# Altium PCB DDR4-UDIMM — 16 GB DDR4.PcbDoc (part 1 of 2)
Units mm, origin at the board's own origin, x right, y up, seen from the top; angles counter-clockwise.
Board outline 133.35 x 31.25 mm, 8 copper layers (Top Layer 1, L2_PWR_GND, L3_DQ_ADDR, L4_VDD, L5_ADDR, L6_ADDR_CK, L7_PWR_GND, Bottom Layer 1), stack 1.398 mm thick; 206 components, 228 nets, 1312 pads, 481 vias.
Unrouted connection lines stored in the file: 1002.
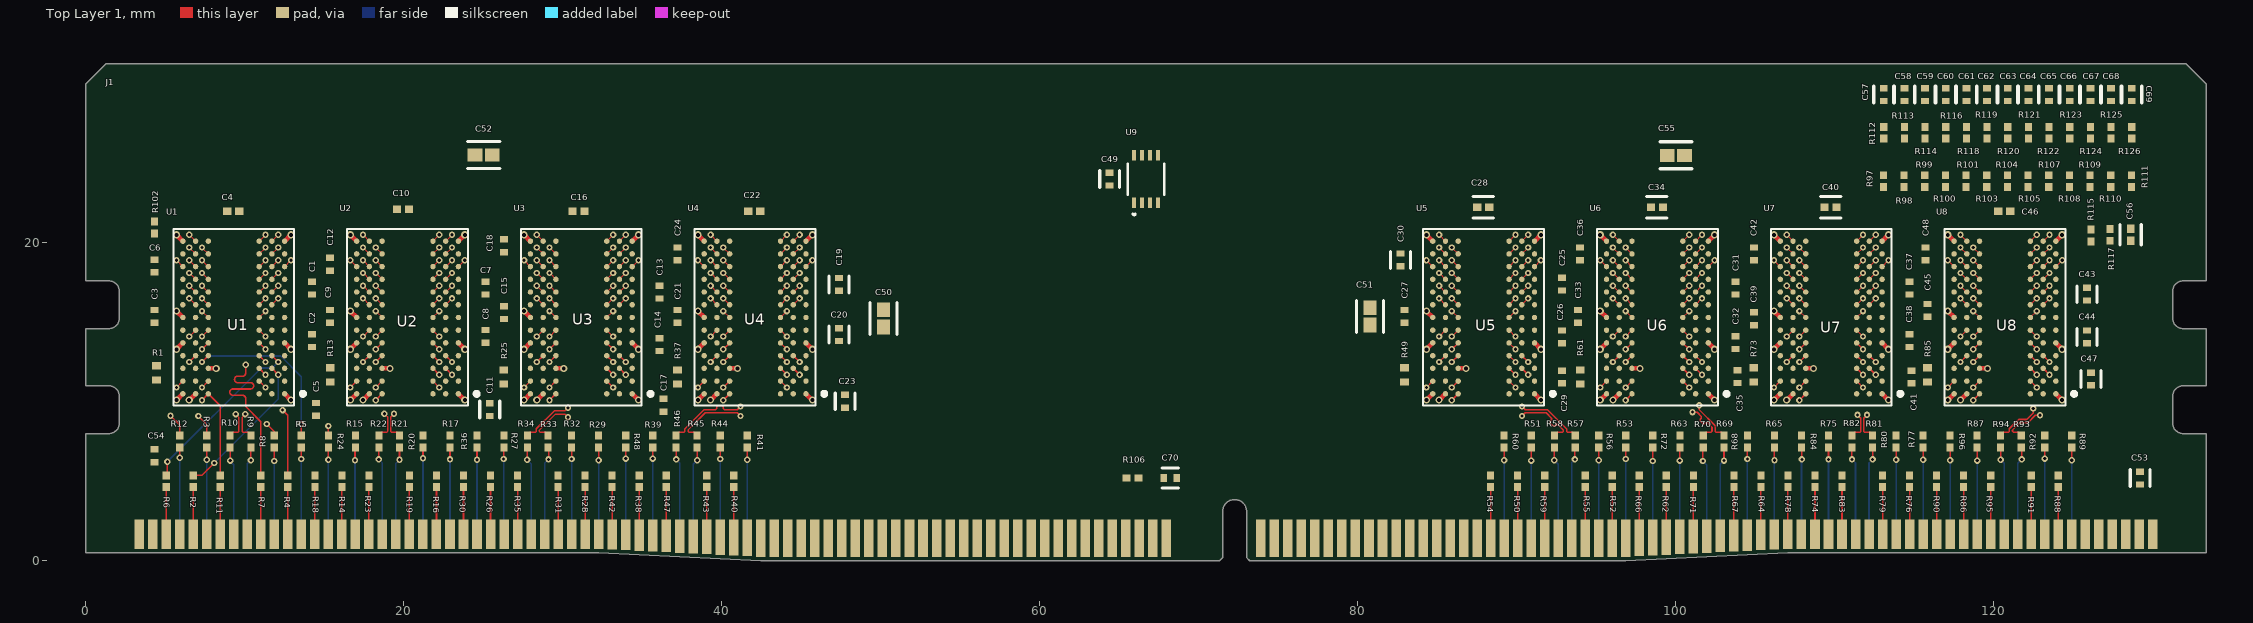
[diagram p0: Top Layer 1 view]
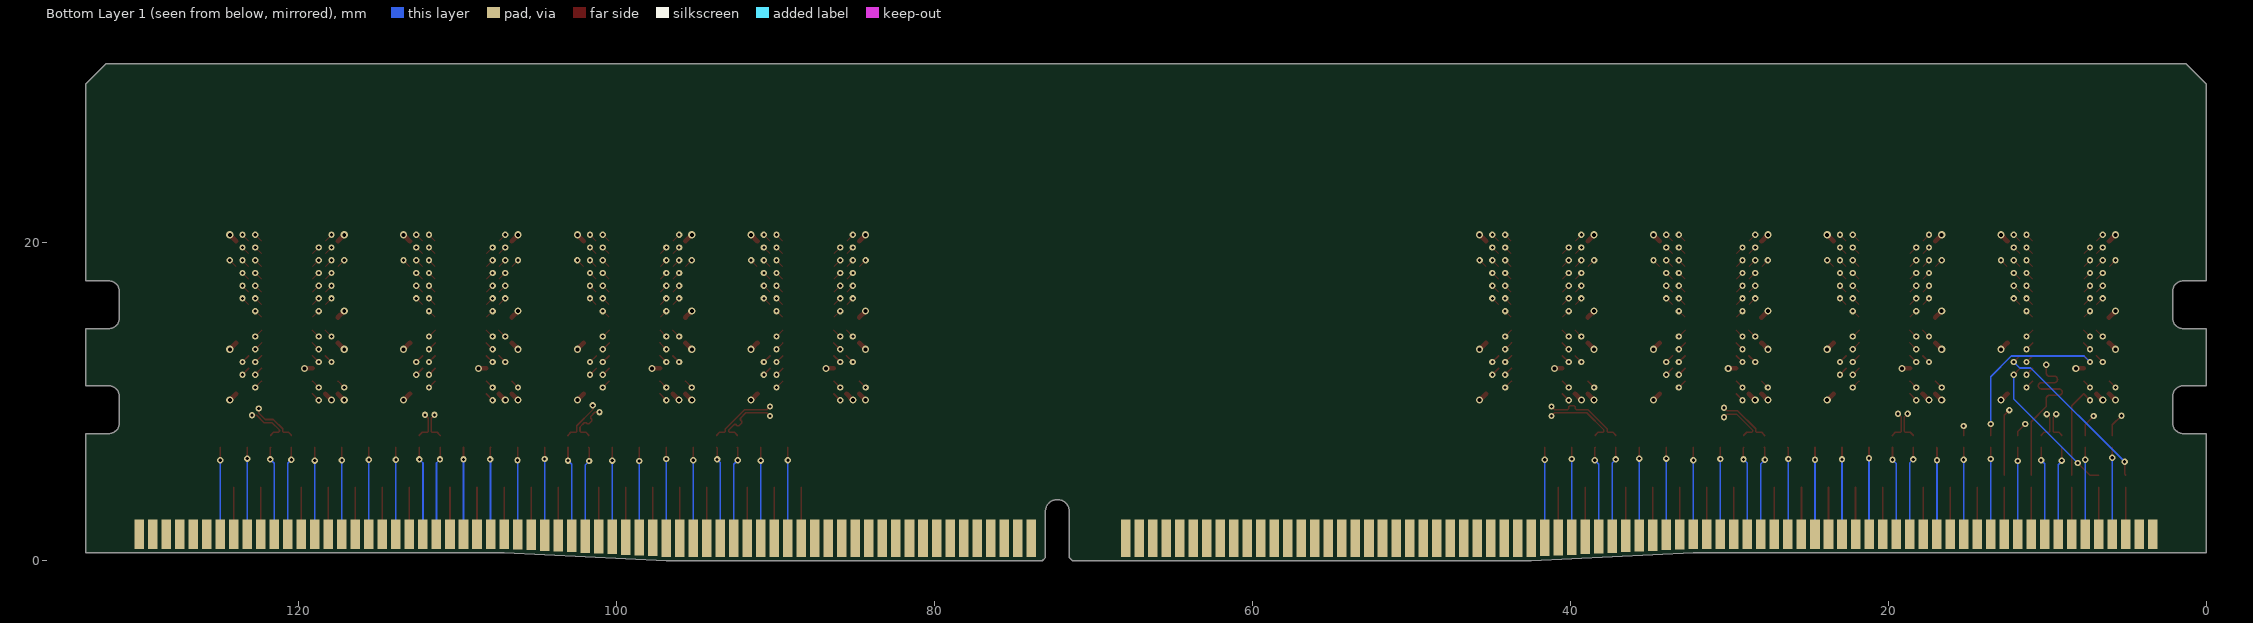
[diagram p1: Bottom Layer 1 view, seen from below]
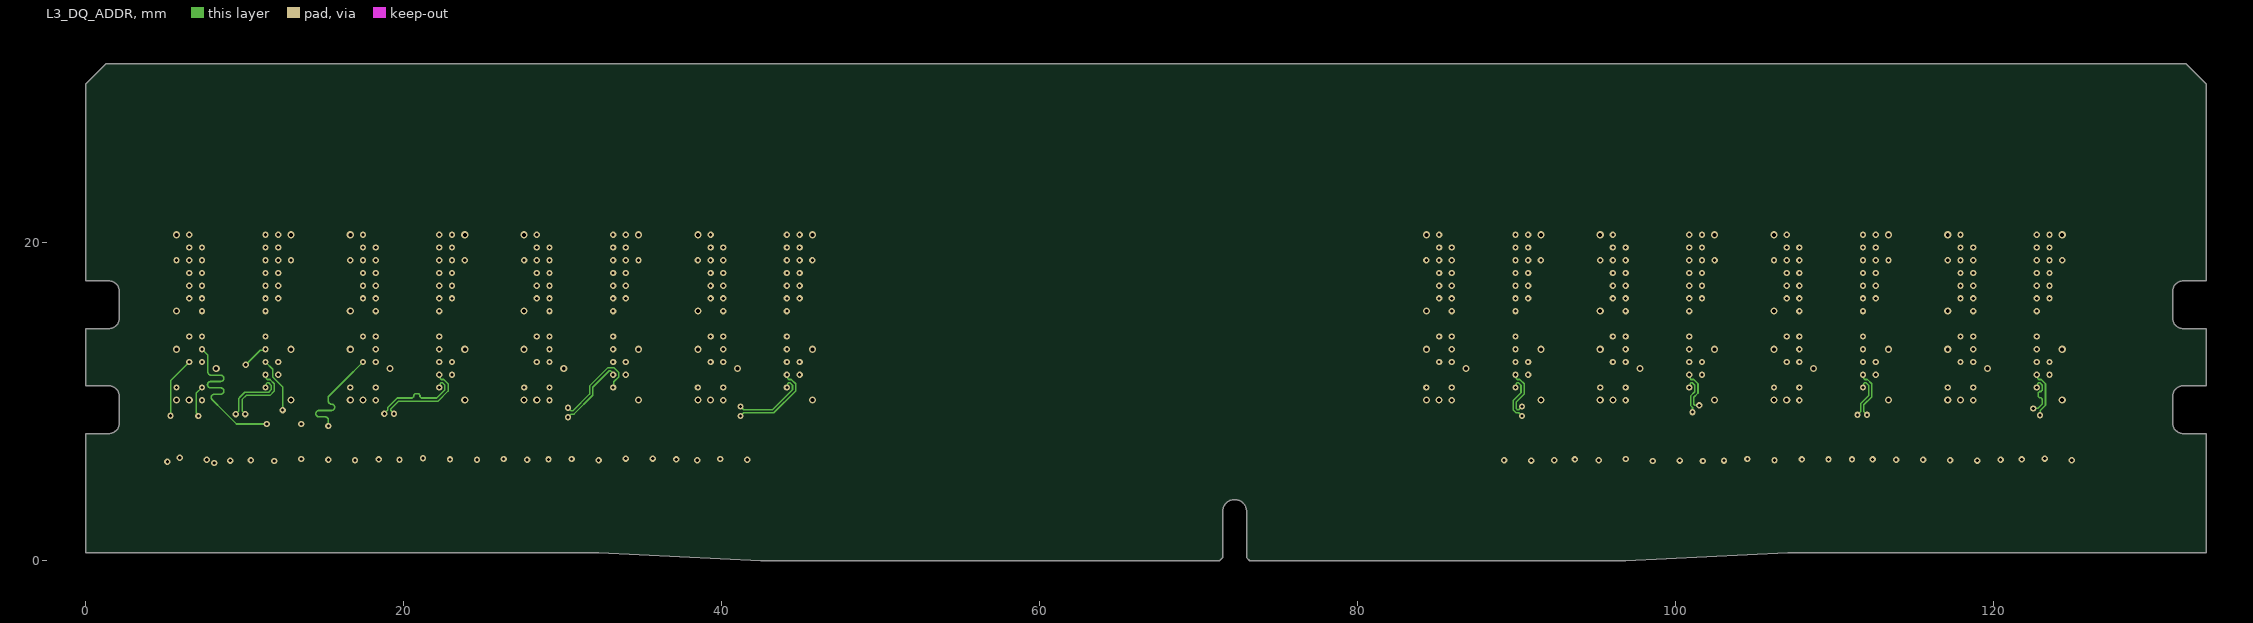
[diagram p2: L3_DQ_ADDR]
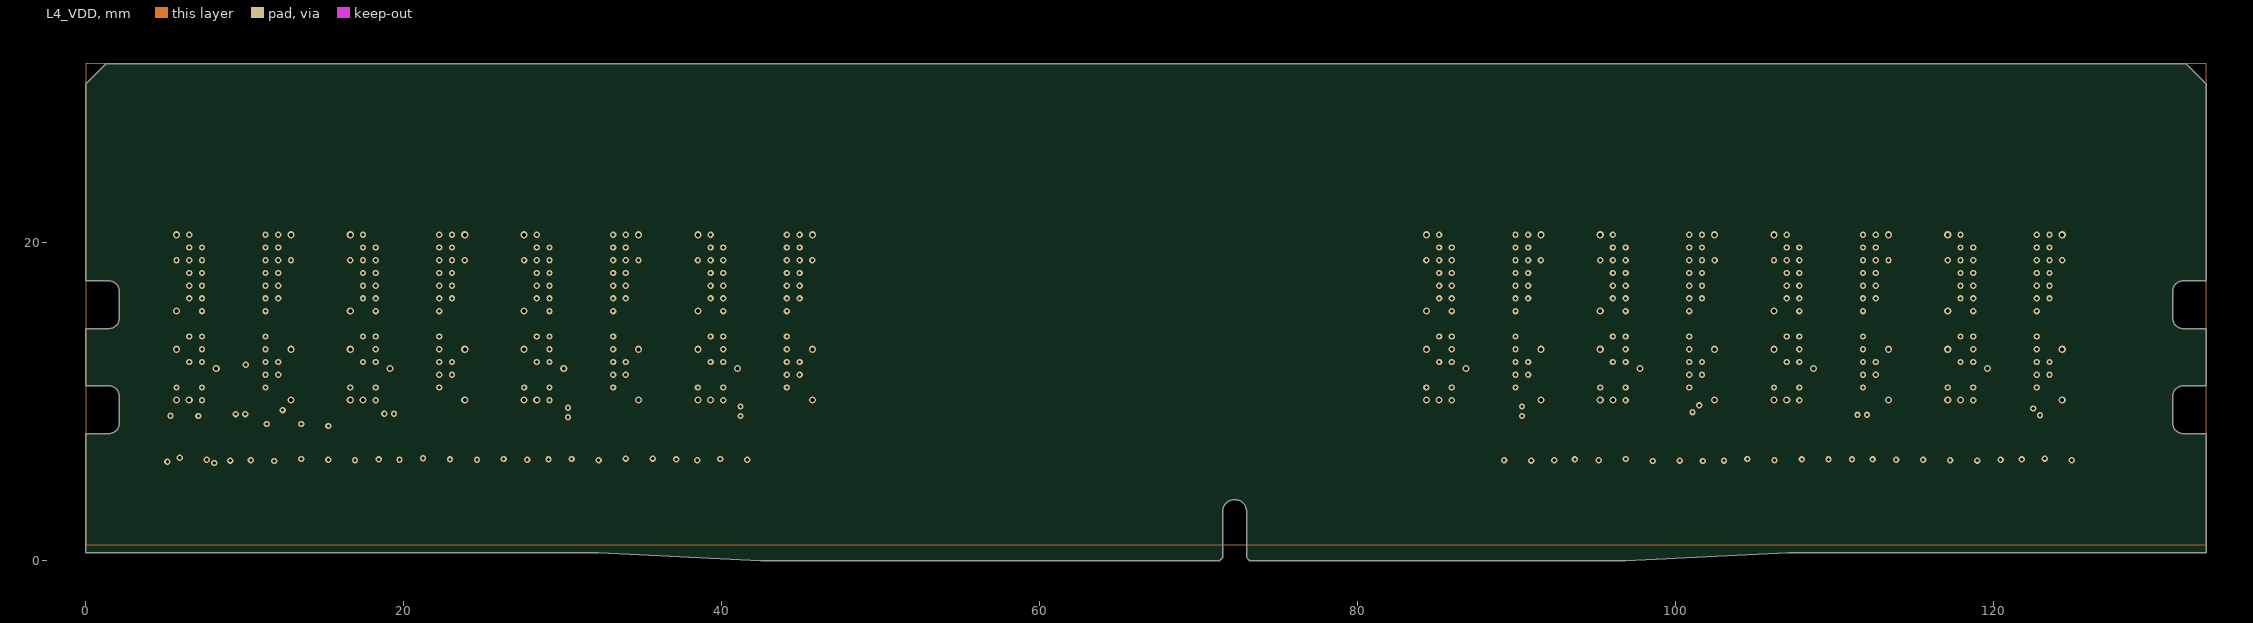
[diagram p3: L4_VDD]

## Layer stack, top to bottom
Top Solder: solder mask 0.0102, Solder Resist, Dk 3.5
Top Layer 1: signal copper 0.0356
Dielectric 2: prepreg 0.07, PP-006, Dk 4.2
L2_PWR_GND: signal copper 0.0178
Dielectric 3: prepreg 0.08, PP-006, Dk 4.2
L3_DQ_ADDR: signal copper 0.0178
Dielectric 4: prepreg 0.42, PP-006, Dk 4.2
L4_VDD: signal copper 0.0178
Dielectric 1: dielectric 0.08, FR-4, Dk 4.2
L5_ADDR: signal copper 0.0178
Dielectric 5: prepreg 0.42, PP-006, Dk 4.2
L6_ADDR_CK: signal copper 0.0178
Dielectric 6: prepreg 0.08, PP-006, Dk 4.2
L7_PWR_GND: signal copper 0.0178
Dielectric 7: prepreg 0.07, PP-006, Dk 4.2
Bottom Layer 1: signal copper 0.0356
Bottom Solder: solder mask 0.0102, Solder Resist, Dk 3.5

## Board outline
0,0.5 0,8 1.45,8 ccw(c1.45,8.65) 2.1,8.65 2.1,10.35 ccw(c1.45,10.35) 1.45,11 0,11 0,14.6 1.45,14.6 ccw(c1.45,15.25) 2.1,15.25 2.1,16.95 ccw(c1.45,16.95) 1.45,17.6 0,17.6 0,30 1.25,31.25 132.1,31.25 133.35,30 133.35,17.6 131.9,17.6 ccw(c131.9,16.95) 131.25,16.95 131.25,15.25 ccw(c131.9,15.25) 131.9,14.6 133.35,14.6 133.35,11 131.9,11 ccw(c131.9,10.35) 131.25,10.35 131.25,8.65 ccw(c131.9,8.65) 131.9,8 133.35,8 133.35,0.5 107.05,0.5 96.85,0 73.2,0 73,0.2 73,3.1 ccw(c72.25,3.1) 71.5,3.1 71.5,0.2 71.3,0 42.45,0 32.25,0.5

## Design rules (kind name [scope] priority, off if disabled: settings)
BoardOutlineClearance [All] p1: gap=0.254 ignorepadtopadclearanceinfootprint=FALSE except(0: Arc-SplitContinuation Track-SplitContinuation SMDPad-OutlineEdge SMDPad-SplitContinuation THPad-SplitContinuation Via-SplitContinuation Fill-SplitContinuation Poly-SplitContinuation Region-SplitContinuation Text-SplitContinuation)
Clearance Clearance_LineToShape [All vs InPolygon] p1: gap=0.2 ignorepadtopadclearanceinfootprint=FALSE
Clearance Clearance_GoldFingers [InComponent('J1') vs InComponent('J1')] p2: gap=0.2 ignorepadtopadclearanceinfootprint=FALSE
Clearance Clearance_ViaToBGA [IsVia vs IsPad And HasFootprint('SA_MFG')] p3: gap=0.175 ignorepadtopadclearanceinfootprint=FALSE
Clearance Clearance_ViaToOtherPad [IsVia vs IsPad] p4: gap=0.15 ignorepadtopadclearanceinfootprint=FALSE
Clearance Clearance_ViaToVia [IsVia vs IsVia] p5: gap=0.2 ignorepadtopadclearanceinfootprint=FALSE
Clearance Clearance_LineToPad [IsTrack vs IsPad] p6: gap=0.125 ignorepadtopadclearanceinfootprint=FALSE
Clearance Clearance_PadToPad [IsPad vs IsPad] p7: gap=0.25 ignorepadtopadclearanceinfootprint=TRUE
Clearance [All] p8: gap=0.1 ignorepadtopadclearanceinfootprint=FALSE
ComponentClearance ComponentClearance_Physical [Not InComponent('J1') vs Not InComponent('J1')] p1: gap=0.25 collisioncheckmode=3 verticalgap=0.2 showdistances=TRUE
ComponentClearance [All] p2 off: gap=0.254 collisioncheckmode=3 verticalgap=0.254 showdistances=FALSE
DiffPairsRouting DiffPair_DQS [InDifferentialPairClass('DP_DQS')] p1: maxlimit=0.127 minlimit=0.1 mostfreqgap=0.1 toplayer_minwidth=0.075 toplayer_maxwidth=0.1 toplayer_prefwidth=0.1 midlayer1_minwidth=0.075 midlayer1_maxwidth=0.1 midlayer1_prefwidth=0.1 midlayer2_minwidth=0.075 midlayer2_maxwidth=0.1 midlayer2_prefwidth=0.1 midlayer3_minwidth=0.075 midlayer3_maxwidth=0.1 midlayer3_prefwidth=0.1 midlayer4_minwidth=0.075 midlayer4_maxwidth=0.1 midlayer4_prefwidth=0.1 midlayer5_minwidth=0.075 midlayer5_maxwidth=0.1 midlayer5_prefwidth=0.1 midlayer6_minwidth=0.075 midlayer6_maxwidth=0.1 midlayer6_prefwidth=0.1 bottomlayer_minwidth=0.075 bottomlayer_maxwidth=0.1 bottomlayer_prefwidth=0.1 maxuncoupledlength=3
DiffPairsRouting DiffPair_CK [InDifferentialPairClass('DP_CK')] p2: maxlimit=0.127 minlimit=0.1 mostfreqgap=0.1 toplayer_minwidth=0.075 toplayer_maxwidth=0.15 toplayer_prefwidth=0.075 midlayer1_minwidth=0.075 midlayer1_maxwidth=0.15 midlayer1_prefwidth=0.075 midlayer2_minwidth=0.075 midlayer2_maxwidth=0.15 midlayer2_prefwidth=0.075 midlayer3_minwidth=0.075 midlayer3_maxwidth=0.15 midlayer3_prefwidth=0.075 midlayer4_minwidth=0.075 midlayer4_maxwidth=0.15 midlayer4_prefwidth=0.075 midlayer5_minwidth=0.075 midlayer5_maxwidth=0.15 midlayer5_prefwidth=0.075 midlayer6_minwidth=0.075 midlayer6_maxwidth=0.15 midlayer6_prefwidth=0.075 bottomlayer_minwidth=0.075 bottomlayer_maxwidth=0.15 bottomlayer_prefwidth=0.075 maxuncoupledlength=3
DiffPairsRouting [All] p3: maxlimit=0.127 minlimit=0.1 mostfreqgap=0.1 toplayer_minwidth=0.075 toplayer_maxwidth=0.15 toplayer_prefwidth=0.1 midlayer1_minwidth=0.075 midlayer1_maxwidth=0.15 midlayer1_prefwidth=0.1 midlayer2_minwidth=0.075 midlayer2_maxwidth=0.15 midlayer2_prefwidth=0.1 midlayer3_minwidth=0.075 midlayer3_maxwidth=0.15 midlayer3_prefwidth=0.1 midlayer4_minwidth=0.075 midlayer4_maxwidth=0.15 midlayer4_prefwidth=0.1 midlayer5_minwidth=0.075 midlayer5_maxwidth=0.15 midlayer5_prefwidth=0.1 midlayer6_minwidth=0.075 midlayer6_maxwidth=0.15 midlayer6_prefwidth=0.1 bottomlayer_minwidth=0.075 bottomlayer_maxwidth=0.15 bottomlayer_prefwidth=0.1 maxuncoupledlength=3
FanoutControl Fanout_BGA [HasFootprint('SA_MFG')] p1: bgadir=Out bgaviamode=Centered fanoutstyle=BGA fanoutdirection=Alternating viagrid=0.025 // Fanout_BGA (Default Rule)
Height [All] p1: minheight=0 maxheight=1.2 prefheight=1
HoleSize [All] p1: absolutevalues=TRUE maxlimit=0.3 minlimit=0.2 maxpercent=80.000 minpercent=20.000
MatchedLengths ML_BYTE0_FULL [InxSignalClass('BYTE0_FULL')] p1: tolerance=1 checknetsindiffpair=FALSE checkdiffpairvsdiffpair=TRUE checkxsignals=TRUE checkothers=TRUE
MatchedLengths ML_DQS_PAIRS [InDifferentialPairClass('DP_DQS')] p2: tolerance=0.1 checknetsindiffpair=TRUE checkdiffpairvsdiffpair=FALSE checkxsignals=FALSE checkothers=FALSE
MatchedLengths ML_BYTE7_DRAM [InNetClass('BYTE7_DRAM')] p3: tolerance=0.5 checknetsindiffpair=FALSE checkdiffpairvsdiffpair=TRUE checkxsignals=TRUE checkothers=TRUE
MatchedLengths ML_BYTE7 [InNetClass('BYTE7')] p4: tolerance=0.5 checknetsindiffpair=FALSE checkdiffpairvsdiffpair=TRUE checkxsignals=TRUE checkothers=TRUE
MatchedLengths ML_BYTE6_DRAM [InNetClass('BYTE6_DRAM')] p5: tolerance=0.5 checknetsindiffpair=FALSE checkdiffpairvsdiffpair=TRUE checkxsignals=TRUE checkothers=TRUE
MatchedLengths ML_BYTE6 [InNetClass('BYTE6')] p6: tolerance=0.5 checknetsindiffpair=FALSE checkdiffpairvsdiffpair=TRUE checkxsignals=TRUE checkothers=TRUE
MatchedLengths ML_BYTE5_DRAM [InNetClass('BYTE5_DRAM')] p7: tolerance=0.5 checknetsindiffpair=FALSE checkdiffpairvsdiffpair=TRUE checkxsignals=TRUE checkothers=TRUE
MatchedLengths ML_BYTE5 [InNetClass('BYTE5')] p8: tolerance=0.5 checknetsindiffpair=FALSE checkdiffpairvsdiffpair=TRUE checkxsignals=TRUE checkothers=TRUE
MatchedLengths ML_BYTE4_DRAM [InNetClass('BYTE4_DRAM')] p9: tolerance=0.5 checknetsindiffpair=FALSE checkdiffpairvsdiffpair=TRUE checkxsignals=TRUE checkothers=TRUE
MatchedLengths ML_BYTE4 [InNetClass('BYTE4')] p10: tolerance=0.5 checknetsindiffpair=FALSE checkdiffpairvsdiffpair=TRUE checkxsignals=TRUE checkothers=TRUE
MatchedLengths ML_BYTE3_DRAM [InNetClass('BYTE3_DRAM')] p11: tolerance=0.5 checknetsindiffpair=FALSE checkdiffpairvsdiffpair=TRUE checkxsignals=TRUE checkothers=TRUE
MatchedLengths ML_BYTE3 [InNetClass('BYTE3')] p12: tolerance=0.5 checknetsindiffpair=FALSE checkdiffpairvsdiffpair=TRUE checkxsignals=TRUE checkothers=TRUE
MatchedLengths ML_BYTE2_DRAM [InNetClass('BYTE2_DRAM')] p13: tolerance=0.5 checknetsindiffpair=FALSE checkdiffpairvsdiffpair=TRUE checkxsignals=TRUE checkothers=TRUE
MatchedLengths ML_BYTE2 [InNetClass('BYTE2')] p14: tolerance=0.5 checknetsindiffpair=FALSE checkdiffpairvsdiffpair=TRUE checkxsignals=TRUE checkothers=TRUE
MatchedLengths ML_BYTE1_DRAM [InNetClass('BYTE1_DRAM')] p15: tolerance=0.5 checknetsindiffpair=FALSE checkdiffpairvsdiffpair=TRUE checkxsignals=TRUE checkothers=TRUE
MatchedLengths ML_BYTE1 [InNetClass('BYTE1')] p16: tolerance=0.5 checknetsindiffpair=FALSE checkdiffpairvsdiffpair=TRUE checkxsignals=TRUE checkothers=TRUE
MatchedLengths ML_BYTE0_DRAM [InNetClass('BYTE0_DRAM')] p17 off: tolerance=0.5 checknetsindiffpair=FALSE checkdiffpairvsdiffpair=TRUE checkxsignals=TRUE checkothers=TRUE
MatchedLengths ML_BYTE0 [InNetClass('BYTE0')] p18 off: tolerance=0.5 checknetsindiffpair=FALSE checkdiffpairvsdiffpair=TRUE checkxsignals=TRUE checkothers=TRUE
MatchedLengths MatchedLengths_DDR_CLOCKS_STROBES [InxSignalClass('ADDR_PP1') OR InxSignalClass('ADDR_PP2') OR InxSignalClass('ADDR_PP3') OR InxSignalClass('ADDR_PP4') OR InxSignalClass('ADDR_PP5') OR InxSignalClass('ADDR_PP6') OR InxSignalClass('ADDR_PP7') OR InxSignalClass('ADDR_PP8')] p19: tolerance=0.1 checknetsindiffpair=TRUE checkdiffpairvsdiffpair=FALSE checkxsignals=FALSE checkothers=FALSE
MatchedLengths MatchedLengths_ADDR_PP8 [InxSignalClass('ADDR_PP8')] p20: tolerance=1 checknetsindiffpair=FALSE checkdiffpairvsdiffpair=TRUE checkxsignals=TRUE checkothers=TRUE
MatchedLengths MatchedLengths_ADDR_PP7 [InxSignalClass('ADDR_PP7')] p21: tolerance=1 checknetsindiffpair=FALSE checkdiffpairvsdiffpair=TRUE checkxsignals=TRUE checkothers=TRUE
MatchedLengths MatchedLengths_ADDR_PP6 [InxSignalClass('ADDR_PP6')] p22: tolerance=1 checknetsindiffpair=FALSE checkdiffpairvsdiffpair=TRUE checkxsignals=TRUE checkothers=TRUE
MatchedLengths MatchedLengths_ADDR_PP5 [InxSignalClass('ADDR_PP5')] p23: tolerance=1 checknetsindiffpair=FALSE checkdiffpairvsdiffpair=TRUE checkxsignals=TRUE checkothers=TRUE
MatchedLengths MatchedLengths_ADDR_PP4 [InxSignalClass('ADDR_PP4')] p24: tolerance=1 checknetsindiffpair=FALSE checkdiffpairvsdiffpair=TRUE checkxsignals=TRUE checkothers=TRUE
MatchedLengths MatchedLengths_ADDR_PP3 [InxSignalClass('ADDR_PP3')] p25: tolerance=1 checknetsindiffpair=FALSE checkdiffpairvsdiffpair=TRUE checkxsignals=TRUE checkothers=TRUE
MatchedLengths MatchedLengths_ADDR_PP2 [InxSignalClass('ADDR_PP2')] p26: tolerance=1 checknetsindiffpair=FALSE checkdiffpairvsdiffpair=TRUE checkxsignals=TRUE checkothers=TRUE
MatchedLengths MatchedLengths_ADDR_PP1 [InxSignalClass('ADDR_PP1')] p27: tolerance=1 checknetsindiffpair=FALSE checkdiffpairvsdiffpair=TRUE checkxsignals=TRUE checkothers=TRUE
MinimumAnnularRing [All] p1: minimumring=0.1
PermittedLayers PermittedLayers_TopOnly [All] p1: toplayerpermitted=TRUE bottomlayerpermitted=FALSE
PolygonConnect PolygonConnect_Vias [IsVia] p1: connectstyle=Direct reliefconductorwidth=0.254 reliefentries=4 polygonreliefangle="90 Angle" airgapwidth=0.254
PolygonConnect [All] p2: connectstyle=Relief reliefconductorwidth=0.2 reliefentries=4 polygonreliefangle="90 Angle" airgapwidth=0.2
RoomDefinition Room_FingerZone [Not InComponent('J1')] p1: confinementstyle=ConfineOut formatcopy=TRUE lockcomponents=FALSE outline 0,0 0,4 133.35,4 133.35,0
RoutingLayers RoutingLayers_POWER [InNetClass('POWER')] p1: top layer_v5=TRUE mid layer 1_v5=TRUE mid layer 2_v5=TRUE mid layer 3_v5=TRUE mid layer 4_v5=TRUE mid layer 5_v5=TRUE mid layer 6_v5=TRUE bottom layer_v5=TRUE
RoutingLayers RoutingLayers_DATA [InNetClass('DATA') Or InNetClass('DATA_DRAM')] p2: top layer_v5=TRUE mid layer 1_v5=FALSE mid layer 2_v5=TRUE mid layer 3_v5=FALSE mid layer 4_v5=FALSE mid layer 5_v5=FALSE mid layer 6_v5=FALSE bottom layer_v5=TRUE
RoutingLayers RoutingLayers_CK [InNetClass('CK') Or InNetClass('CK_UNUSED')] p3: top layer_v5=TRUE mid layer 1_v5=FALSE mid layer 2_v5=FALSE mid layer 3_v5=FALSE mid layer 4_v5=FALSE mid layer 5_v5=TRUE mid layer 6_v5=FALSE bottom layer_v5=TRUE
RoutingLayers RoutingLayers_ADDR [InNetClass('ADDR') Or InNetClass('CTRL') Or InNetClass('RESET') Or InNetClass('ALERT')] p4: top layer_v5=TRUE mid layer 1_v5=FALSE mid layer 2_v5=TRUE mid layer 3_v5=FALSE mid layer 4_v5=TRUE mid layer 5_v5=TRUE mid layer 6_v5=FALSE bottom layer_v5=TRUE
RoutingLayers [All] p5: top layer_v5=TRUE mid layer 1_v5=FALSE mid layer 2_v5=TRUE mid layer 3_v5=FALSE mid layer 4_v5=TRUE mid layer 5_v5=TRUE mid layer 6_v5=FALSE bottom layer_v5=TRUE
RoutingTopology RoutingTopology_DDRAddressAndControls [InNetClass('DDR_AddressAndControls')] p1: topology=Daisy_Simple
RoutingTopology [All] p2: topology=Shortest
RoutingVias RoutingVias_POWER [InNetClass('POWER')] p1: holewidth=0.25 width=0.45 viastyle="Through Hole" minholewidth=0.2 minwidth=0.4 maxholewidth=0.3 maxwidth=0.45
RoutingVias [All] p2: holewidth=0.2 width=0.4 viastyle="Through Hole" minholewidth=0.2 minwidth=0.4 maxholewidth=0.25 maxwidth=0.45
SolderMaskExpansion SolderMask_TentedVias [IsVia] p1: expansion=0 istentingtop=TRUE
SolderMaskExpansion [All] p2: expansion=0 istentingtop=FALSE
SupplyNets "Schematic Supply Nets_5" [InNet('VDD')] p1: voltage=0.000
SupplyNets "Schematic Supply Nets_4" [InNet('VREFCA')] p2: voltage=0.000
SupplyNets "Schematic Supply Nets_3" [InNet('VDDSPD')] p3: voltage=0.000
SupplyNets "Schematic Supply Nets_2" [InNet('VPP')] p4: voltage=0.000
SupplyNets "Schematic Supply Nets_1" [InNet('GND')] p5: voltage=0.000
SupplyNets "Schematic Supply Nets" [InNet('VTT')] p6: voltage=0.000
UnRoutedNet [All] p1: checkbadconnections=TRUE
Width Width_POWER [InNetClass('POWER')] p1: maxlimit=2 minlimit=0.15 preferedwidth=0.3
Width Width_CK [InNetClass('CK') Or InNetClass('CK_UNUSED')] p2: maxlimit=0.15 minlimit=0.075 preferedwidth=0.075
Width Width_ADDR_CTRL [InNetClass('ADDR') Or InNetClass('CTRL') Or InNetClass('RESET') Or InNetClass('ALERT')] p3: maxlimit=0.15 minlimit=0.075 preferedwidth=0.075
Width Width_DATA [InNetClass('DATA') Or InNetClass('DATA_DRAM')] p4: maxlimit=0.1 minlimit=0.075 preferedwidth=0.1
Width Width_SPD [InNetClass('SPD')] p5: maxlimit=0.3 minlimit=0.1 preferedwidth=0.15
Width [All] p6: maxlimit=0.3 minlimit=0.075 preferedwidth=0.1
22 further rules are at their usual default settings.

## Classes and differential pairs
net class BYTE7_DRAM: NetR86_1 NetR87_1 NetR88_1 NetR89_1 NetR90_1 NetR91_1 NetR92_1 NetR93_1 NetR94_1 NetR95_1 NetR96_1
net class BYTE6_DRAM: NetR74_1 NetR75_1 NetR76_1 NetR77_1 NetR78_1 NetR79_1 NetR80_1 NetR81_1 NetR82_1 NetR83_1 NetR84_1
net class BYTE5_DRAM: NetR62_1 NetR63_1 NetR64_1 NetR65_1 NetR66_1 NetR67_1 NetR68_1 NetR69_1 NetR70_1 NetR71_1 NetR72_1
net class BYTE4_DRAM: NetR50_1 NetR51_1 NetR52_1 NetR53_1 NetR54_1 NetR55_1 NetR56_1 NetR57_1 NetR58_1 NetR59_1 NetR60_1
net class BYTE3_DRAM: NetR38_1 NetR39_1 NetR40_1 NetR41_1 NetR42_1 NetR43_1 NetR44_1 NetR45_1 NetR46_1 NetR47_1 NetR48_1
net class BYTE2_DRAM: NetR26_1 NetR27_1 NetR28_1 NetR29_1 NetR30_1 NetR31_1 NetR32_1 NetR33_1 NetR34_1 NetR35_1 NetR36_1
net class BYTE1_DRAM: NetR14_1 NetR15_1 NetR16_1 NetR17_1 NetR18_1 NetR19_1 NetR20_1 NetR21_1 NetR22_1 NetR23_1 NetR24_1
net class BYTE0_DRAM: NetR2_1 NetR3_1 NetR4_1 NetR5_1 NetR6_1 NetR7_1 NetR8_1 NetR9_1 NetR10_1 NetR11_1 NetR12_1
net class DDR_AddressAndControls: A0 A1 A2 A3 A4 A5 A6 A7 A8 A9 A11 A13 A15_CAS A16_RAS BA0 BA1 CK0_C CK0_T CS ODT WE
net class DATA_DRAM: NetR2_1 NetR3_1 NetR4_1 NetR5_1 NetR6_1 NetR7_1 NetR8_1 NetR9_1 NetR10_1 NetR11_1 NetR12_1 NetR14_1 NetR15_1 NetR16_1 NetR17_1 NetR18_1 NetR19_1 NetR20_1 NetR21_1 NetR22_1 NetR23_1 NetR24_1 NetR26_1 NetR27_1 NetR28_1 NetR29_1 NetR30_1 NetR31_1 NetR32_1 NetR33_1 NetR34_1 NetR35_1 NetR36_1 NetR38_1 NetR39_1 NetR40_1 NetR41_1 NetR42_1 NetR43_1 NetR44_1 NetR45_1 NetR46_1 NetR47_1 NetR48_1 NetR50_1 NetR51_1 NetR52_1 NetR53_1 NetR54_1 NetR55_1 NetR56_1 NetR57_1 NetR58_1 NetR59_1 NetR60_1 NetR62_1 NetR63_1 NetR64_1 NetR65_1 NetR66_1 NetR67_1 NetR68_1 NetR69_1 NetR70_1 NetR71_1 NetR72_1 NetR74_1 NetR75_1 NetR76_1 NetR77_1 NetR78_1 NetR79_1 NetR80_1 NetR81_1 NetR82_1 NetR83_1 NetR84_1 NetR86_1 NetR87_1 NetR88_1 NetR89_1 NetR90_1 NetR91_1 NetR92_1 NetR93_1 NetR94_1 NetR95_1 NetR96_1
differential pair class DP_CK: CK0 CK1
differential pair class DP_DQS: DQS0 DQS0_DRAM DQS1 DQS1_DRAM DQS2 DQS2_DRAM DQS3 DQS3_DRAM DQS4 DQS4_DRAM DQS5 DQS5_DRAM DQS6 DQS6_DRAM DQS7 DQS7_DRAM
net class POWER: GND VDD VDDSPD VPP VREFCA VTT
net class SPD: SA0 SA1 SA2 SCL SDA
net class ALERT: ALERT_n
net class RESET: RESET_N
net class CK_UNUSED: CK1_C CK1_T
net class CK: CK0_C CK0_T
net class CTRL: CKE CS ODT
net class ADDR: A0 A1 A2 A3 A4 A5 A6 A7 A8 A9 A10_AP A11 A12_BC A13 A15_CAS A16_RAS ACT BA0 BA1 BG0 BG1 PAR WE
net class BYTE7: DM7 DQ56 DQ57 DQ58 DQ59 DQ60 DQ61 DQ62 DQ63 DQS7_C DQS7_T
net class BYTE6: DM6 DQ48 DQ49 DQ50 DQ51 DQ52 DQ53 DQ54 DQ55 DQS6_C DQS6_T
net class BYTE5: DM5 DQ40 DQ41 DQ42 DQ43 DQ44 DQ45 DQ46 DQ47 DQS5_C DQS5_T
net class BYTE4: DM4 DQ32 DQ33 DQ34 DQ35 DQ36 DQ37 DQ38 DQ39 DQS4_C DQS4_T
net class BYTE3: DM3 DQ24 DQ25 DQ26 DQ27 DQ28 DQ29 DQ30 DQ31 DQS3_C DQS3_T
net class BYTE2: DM2 DQ16 DQ17 DQ18 DQ19 DQ20 DQ21 DQ22 DQ23 DQS2_C DQS2_T
net class BYTE1: DM1 DQ8 DQ9 DQ10 DQ11 DQ12 DQ13 DQ14 DQ15 DQS1_C DQS1_T
net class BYTE0: DM0 DQ0 DQ1 DQ2 DQ3 DQ4 DQ5 DQ6 DQ7 DQS0_C DQS0_T
net class DATA: DM0 DM1 DM2 DM3 DM4 DM5 DM6 DM7 DQ0 DQ1 DQ2 DQ3 DQ4 DQ5 DQ6 DQ7 DQ8 DQ9 DQ10 DQ11 DQ12 DQ13 DQ14 DQ15 DQ16 DQ17 DQ18 DQ19 DQ20 DQ21 DQ22 DQ23 DQ24 DQ25 DQ26 DQ27 DQ28 DQ29 DQ30 DQ31 DQ32 DQ33 DQ34 DQ35 DQ36 DQ37 DQ38 DQ39 DQ40 DQ41 DQ42 DQ43 DQ44 DQ45 DQ46 DQ47 DQ48 DQ49 DQ50 DQ51 DQ52 DQ53 DQ54 DQ55 DQ56 DQ57 DQ58 DQ59 DQ60 DQ61 DQ62 DQ63 DQS0_C DQS0_T DQS1_C DQS1_T DQS2_C DQS2_T DQS3_C DQS3_T DQS4_C DQS4_T DQS5_C DQS5_T DQS6_C DQS6_T DQS7_C DQS7_T
net class DM: DM0 DM1 DM2 DM3 DM4 DM5 DM6 DM7
net class DQS: DQS0_C DQS0_T DQS1_C DQS1_T DQS2_C DQS2_T DQS3_C DQS3_T DQS4_C DQS4_T DQS5_C DQS5_T DQS6_C DQS6_T DQS7_C DQS7_T
net class DQ: DQ0 DQ1 DQ2 DQ3 DQ4 DQ5 DQ6 DQ7 DQ8 DQ9 DQ10 DQ11 DQ12 DQ13 DQ14 DQ15 DQ16 DQ17 DQ18 DQ19 DQ20 DQ21 DQ22 DQ23 DQ24 DQ25 DQ26 DQ27 DQ28 DQ29 DQ30 DQ31 DQ32 DQ33 DQ34 DQ35 DQ36 DQ37 DQ38 DQ39 DQ40 DQ41 DQ42 DQ43 DQ44 DQ45 DQ46 DQ47 DQ48 DQ49 DQ50 DQ51 DQ52 DQ53 DQ54 DQ55 DQ56 DQ57 DQ58 DQ59 DQ60 DQ61 DQ62 DQ63
differential pair DQS1_DRAM: +NetR21_1 -NetR22_1
differential pair DQS7_DRAM: +NetR93_1 -NetR94_1
differential pair DQS6_DRAM: +NetR81_1 -NetR82_1
differential pair DQS5_DRAM: +NetR69_1 -NetR70_1
differential pair DQS4_DRAM: +NetR57_1 -NetR58_1
differential pair DQS3_DRAM: +NetR45_1 -NetR46_1
differential pair DQS2_DRAM: +NetR33_1 -NetR34_1
differential pair DQS0_DRAM: +NetR9_1 -NetR10_1
differential pair CK0: +CK0_T -CK0_C
differential pair CK1: +CK1_T -CK1_C
differential pair DQS0: +DQS0_T -DQS0_C
differential pair DQS1: +DQS1_T -DQS1_C
differential pair DQS2: +DQS2_T -DQS2_C
differential pair DQS3: +DQS3_T -DQS3_C
differential pair DQS4: +DQS4_T -DQS4_C
differential pair DQS5: +DQS5_T -DQS5_C
differential pair DQS6: +DQS6_T -DQS6_C
differential pair DQS7: +DQS7_T -DQS7_C

## Components (designator, comment, footprint, x,y, rotation, side; value= is the part's Value field where it differs from the comment)
C1 "0.1uF" FP-GRM15-MFG 14.224,17.145 r90 top value=0.10μF
C2 "0.1uF" FP-GRM15-MFG 14.224,13.843 r90 top value=0.10μF
C3 "0.1uF" FP-GRM15-MFG 4.318,15.367 r90 top value=0.10μF
C4 "1uF" FP-CL511-IPC_C 9.271,21.971 r0 top
C5 "0.1uF" FP-GRM15-MFG 14.478,9.525 r90 top value=0.10μF
C6 "0.1uF" FP-GRM15-MFG 4.318,18.542 r90 top value=0.10μF
C7 "0.1uF" FP-GRM15-MFG 25.146,17.145 r90 top value=0.10μF
C8 "0.1uF" FP-GRM15-MFG 25.146,14.116 r90 top value=0.10μF
C9 "0.1uF" FP-GRM15-MFG 15.367,15.367 r90 top value=0.10μF
C10 "1uF" FP-CL511-IPC_C 19.939,22.098 r0 top
C11 "0.1uF" FP-GRM15-MFG 25.4,9.506 r90 top value=0.10μF
C12 "0.1uF" FP-GRM15-MFG 15.367,18.65 r90 top value=0.10μF
C13 "0.1uF" FP-GRM15-MFG 36.068,16.891 r90 top value=0.10μF
C14 "0.1uF" FP-GRM15-MFG 36.068,13.589 r90 top value=0.10μF
C15 "0.1uF" FP-GRM15-MFG 26.289,15.602 r90 top value=0.10μF
C16 "1uF" FP-CL511-IPC_C 30.988,21.971 r0 top
C17 "0.1uF" FP-GRM15-MFG 36.322,9.779 r90 top value=0.10μF
C18 "0.1uF" FP-GRM15-MFG 26.289,19.812 r270 top value=0.10μF
C19 "0.1uF" FP-GRM15-MFG 47.371,17.38 r90 top value=0.10μF
C20 "0.1uF" FP-GRM15-MFG 47.371,14.224 r90 top value=0.10μF
C21 "0.1uF" FP-GRM15-MFG 37.211,15.367 r90 top value=0.10μF
C22 "1uF" FP-CL511-IPC_C 42.037,21.971 r0 top
C23 "0.1uF" FP-GRM15-MFG 47.752,10.033 r90 top value=0.10μF
C24 "0.1uF" FP-GRM15-MFG 37.211,19.304 r90 top value=0.10μF
C25 "0.1uF" FP-GRM15-MFG 92.837,17.399 r90 top value=0.10μF
C26 "0.1uF" FP-GRM15-MFG 92.837,14.078 r90 top value=0.10μF
C27 "0.1uF" FP-GRM15-MFG 82.931,15.367 r90 top value=0.10μF
C28 "1uF" FP-CL511-IPC_C 87.884,22.225 r0 top
C29 "0.1uF" FP-GRM15-MFG 92.837,11.557 r90 top value=0.10μF
C30 "0.1uF" FP-GRM15-MFG 82.677,18.923 r90 top value=0.10μF
C31 "0.1uF" FP-GRM15-MFG 103.759,17.145 r270 top value=0.10μF
C32 "0.1uF" FP-GRM15-MFG 103.759,13.716 r90 top value=0.10μF
C33 "0.1uF" FP-GRM15-MFG 93.853,15.367 r90 top value=0.10μF
C34 "1uF" FP-CL511-IPC_C 98.806,22.225 r0 top
C35 "0.1uF" FP-GRM15-MFG 103.886,11.576 r90 top value=0.10μF
C36 "0.1uF" FP-GRM15-MFG 93.98,19.304 r90 top value=0.10μF
C37 "0.1uF" FP-GRM15-MFG 114.681,17.145 r270 top value=0.10μF
C38 "0.1uF" FP-GRM15-MFG 114.681,13.843 r90 top value=0.10μF
C39 "0.1uF" FP-GRM15-MFG 104.902,15.221 r90 top value=0.10μF
C40 "1uF" FP-CL511-IPC_C 109.73,22.225 r0 top
C41 "0.1uF" FP-GRM15-MFG 114.808,11.557 r90 top value=0.10μF
C42 "0.1uF" FP-GRM15-MFG 104.902,19.304 r90 top value=0.10μF
C43 "0.1uF" FP-GRM15-MFG 125.857,16.764 r270 top value=0.10μF
C44 "0.1uF" FP-GRM15-MFG 125.857,14.078 r90 top value=0.10μF
C45 "0.1uF" FP-GRM15-MFG 115.824,15.748 r90 top value=0.10μF
C46 "1uF" FP-CL511-IPC_C 120.65,21.971 r0 top
C47 "0.1uF" FP-GRM15-MFG 126.111,11.43 r90 top value=0.10μF
C48 "0.1uF" FP-GRM15-MFG 115.697,19.304 r90 top value=0.10μF
C49 "0.1uF" FP-GRM15-MFG 64.389,24.003 r90 top value=0.10μF
C50 "4.7uF" FP-C1608-080-0_1-IPC_C 50.165,15.24 r90 top
C51 "4.7uF" FP-C1608-080-0_1-IPC_C 80.772,15.367 r90 top
C52 "4.7uF" FP-C1608-080-0_1-IPC_C 25.019,25.527 r0 top
C53 "0.1uF" FP-GRM15-MFG 129.2,5.2 r90 top value=0.10μF
C54 "0.1uF" FP-GRM15-MFG 4.318,6.604 r90 top value=0.10μF
C55 "4.7uF" FP-C1608-080-0_1-IPC_C 100,25.5 r0 top
C56 "0.01uF" FP-GRM155-0_05-IPC_C 128.6,20.5 r90 top
C57 "0.1uF" FP-GRM15-MFG 113.074,29.318 r90 top value=0.10μF
C58 "0.1uF" FP-GRM15-MFG 114.374,29.318 r90 top value=0.10μF
C59 "0.1uF" FP-GRM15-MFG 115.674,29.318 r90 top value=0.10μF
C60 "0.1uF" FP-GRM15-MFG 116.974,29.318 r90 top value=0.10μF
C61 "0.1uF" FP-GRM15-MFG 118.274,29.318 r90 top value=0.10μF
C62 "0.1uF" FP-GRM15-MFG 119.574,29.318 r90 top value=0.10μF
C63 "0.1uF" FP-GRM15-MFG 120.874,29.318 r90 top value=0.10μF
C64 "0.1uF" FP-GRM15-MFG 122.174,29.318 r90 top value=0.10μF
C65 "0.1uF" FP-GRM15-MFG 123.474,29.318 r90 top value=0.10μF
C66 "0.1uF" FP-GRM15-MFG 124.774,29.318 r90 top value=0.10μF
C67 "0.1uF" FP-GRM15-MFG 126.074,29.318 r90 top value=0.10μF
C68 "0.1uF" FP-GRM15-MFG 127.374,29.318 r90 top value=0.10μF
C69 "0.1uF" FP-GRM15-MFG 128.674,29.318 r90 top value=0.10μF
C70 "0.1uF" FP-GRM15-MFG 68.199,5.207 r180 top value=0.10μF
J1 "DDR4_UDIMM_288" DDR4_UDIMM_288_MO309 0,0 r0 top
R1 "240R 1% 0402(1005)" RESC0402(1005)_L 4.445,11.811 r90 top value="240.00 Ohm"
R2 "15R 5%" RESC1005X40X25LL05T10 6.75,5 r270 top
R3 "15R 5%" RESC1005X40X25LL05T10 7.6,7.5 r270 top
R4 "15R 5%" RESC1005X40X25LL05T10 12.7,5 r270 top
R5 "15R 5%" RESC1005X40X25LL05T10 13.55,7.5 r270 top
R6 "15R 5%" RESC1005X40X25LL05T10 5.05,5 r270 top
R7 "15R 5%" RESC1005X40X25LL05T10 11,5 r270 top
R8 "15R 5%" RESC1005X40X25LL05T10 11.85,7.5 r270 top
R9 "15R 5%" RESC1005X40X25LL05T10 10.375,7.5 r270 top
R10 "15R 5%" RESC1005X40X25LL05T10 9.075,7.5 r270 top
R11 "15R 5%" RESC1005X40X25LL05T10 8.45,5 r270 top
R12 "15R 5%" RESC1005X40X25LL05T10 5.9,7.5 r270 top
R13 "240R 1% 0402(1005)" RESC0402(1005)_L 15.367,11.684 r90 top value="240.00 Ohm"
R14 "15R 5%" RESC1005X40X25LL05T10 16.1,5 r270 top
R15 "15R 5%" RESC1005X40X25LL05T10 16.95,7.5 r270 top
R16 "15R 5%" RESC1005X40X25LL05T10 22.05,5 r270 top
R17 "15R 5%" RESC1005X40X25LL05T10 22.9,7.5 r270 top
R18 "15R 5%" RESC1005X40X25LL05T10 14.4,5 r270 top
R19 "15R 5%" RESC1005X40X25LL05T10 20.35,5 r270 top
R20 "15R 5%" RESC1005X40X25LL05T10 21.2,7.5 r270 top
R21 "15R 5%" RESC1005X40X25LL05T10 19.725,7.5 r270 top
R22 "15R 5%" RESC1005X40X25LL05T10 18.425,7.5 r270 top
R23 "15R 5%" RESC1005X40X25LL05T10 17.8,5 r270 top
R24 "15R 5%" RESC1005X40X25LL05T10 15.25,7.5 r270 top
R25 "240R 1% 0402(1005)" RESC0402(1005)_L 26.289,11.557 r90 top value="240.00 Ohm"
R26 "15R 5%" RESC1005X40X25LL05T10 25.45,5 r270 top
R27 "15R 5%" RESC1005X40X25LL05T10 26.3,7.5 r270 top
R28 "15R 5%" RESC1005X40X25LL05T10 31.4,5 r270 top
R29 "15R 5%" RESC1005X40X25LL05T10 32.25,7.5 r270 top
R30 "15R 5%" RESC1005X40X25LL05T10 23.75,5 r270 top
R31 "15R 5%" RESC1005X40X25LL05T10 29.7,5 r270 top
R32 "15R 5%" RESC1005X40X25LL05T10 30.55,7.5 r270 top
R33 "15R 5%" RESC1005X40X25LL05T10 29.075,7.5 r270 top
R34 "15R 5%" RESC1005X40X25LL05T10 27.775,7.5 r270 top
R35 "15R 5%" RESC1005X40X25LL05T10 27.15,5 r270 top
R36 "15R 5%" RESC1005X40X25LL05T10 24.6,7.5 r270 top
R37 "240R 1% 0402(1005)" RESC0402(1005)_L 37.211,11.557 r90 top value="240.00 Ohm"
R38 "15R 5%" RESC1005X40X25LL05T10 34.8,5 r270 top
R39 "15R 5%" RESC1005X40X25LL05T10 35.65,7.5 r270 top
R40 "15R 5%" RESC1005X40X25LL05T10 40.75,5 r270 top
R41 "15R 5%" RESC1005X40X25LL05T10 41.6,7.5 r270 top
R42 "15R 5%" RESC1005X40X25LL05T10 33.1,5 r270 top
R43 "15R 5%" RESC1005X40X25LL05T10 39.05,5 r270 top
R44 "15R 5%" RESC1005X40X25LL05T10 39.9,7.5 r270 top
R45 "15R 5%" RESC1005X40X25LL05T10 38.425,7.5 r270 top
R46 "15R 5%" RESC1005X40X25LL05T10 37.125,7.5 r270 top
R47 "15R 5%" RESC1005X40X25LL05T10 36.5,5 r270 top
R48 "15R 5%" RESC1005X40X25LL05T10 33.95,7.5 r270 top
R49 "240R 1% 0402(1005)" RESC0402(1005)_L 82.931,11.684 r90 top value="240.00 Ohm"
R50 "15R 5%" RESC1005X40X25LL05T10 90.05,5 r270 top
R51 "15R 5%" RESC1005X40X25LL05T10 90.9,7.5 r270 top
R52 "15R 5%" RESC1005X40X25LL05T10 96,5 r270 top
R53 "15R 5%" RESC1005X40X25LL05T10 96.85,7.5 r270 top
R54 "15R 5%" RESC1005X40X25LL05T10 88.35,5 r270 top
R55 "15R 5%" RESC1005X40X25LL05T10 94.3,5 r270 top
R56 "15R 5%" RESC1005X40X25LL05T10 95.15,7.5 r270 top
R57 "15R 5%" RESC1005X40X25LL05T10 93.675,7.5 r270 top
R58 "15R 5%" RESC1005X40X25LL05T10 92.375,7.5 r270 top
R59 "15R 5%" RESC1005X40X25LL05T10 91.75,5 r270 top
R60 "15R 5%" RESC1005X40X25LL05T10 89.2,7.5 r270 top
R61 "240R 1% 0402(1005)" RESC0402(1005)_L 93.98,11.557 r90 top value="240.00 Ohm"
R62 "15R 5%" RESC1005X40X25LL05T10 99.4,5 r270 top
R63 "15R 5%" RESC1005X40X25LL05T10 100.25,7.5 r270 top
R64 "15R 5%" RESC1005X40X25LL05T10 105.35,5 r270 top
R65 "15R 5%" RESC1005X40X25LL05T10 106.2,7.5 r270 top
R66 "15R 5%" RESC1005X40X25LL05T10 97.7,5 r270 top
R67 "15R 5%" RESC1005X40X25LL05T10 103.65,5 r270 top
R68 "15R 5%" RESC1005X40X25LL05T10 104.5,7.5 r270 top
R69 "15R 5%" RESC1005X40X25LL05T10 103.025,7.5 r270 top
R70 "15R 5%" RESC1005X40X25LL05T10 101.725,7.5 r270 top
R71 "15R 5%" RESC1005X40X25LL05T10 101.1,5 r270 top
R72 "15R 5%" RESC1005X40X25LL05T10 98.55,7.5 r270 top
R73 "240R 1% 0402(1005)" RESC0402(1005)_L 104.902,11.684 r90 top value="240.00 Ohm"
R74 "15R 5%" RESC1005X40X25LL05T10 108.75,5 r270 top
R75 "15R 5%" RESC1005X40X25LL05T10 109.6,7.5 r270 top
R76 "15R 5%" RESC1005X40X25LL05T10 114.7,5 r270 top
R77 "15R 5%" RESC1005X40X25LL05T10 115.55,7.5 r270 top
R78 "15R 5%" RESC1005X40X25LL05T10 107.05,5 r270 top
R79 "15R 5%" RESC1005X40X25LL05T10 113,5 r270 top
R80 "15R 5%" RESC1005X40X25LL05T10 113.85,7.5 r270 top
R81 "15R 5%" RESC1005X40X25LL05T10 112.375,7.5 r270 top
R82 "15R 5%" RESC1005X40X25LL05T10 111.075,7.5 r270 top
R83 "15R 5%" RESC1005X40X25LL05T10 110.45,5 r270 top
R84 "15R 5%" RESC1005X40X25LL05T10 107.9,7.5 r270 top
R85 "240R 1% 0402(1005)" RESC0402(1005)_L 115.824,11.684 r90 top value="240.00 Ohm"
R86 "15R 5%" RESC1005X40X25LL05T10 118.1,5 r270 top
R87 "15R 5%" RESC1005X40X25LL05T10 118.95,7.5 r270 top
R88 "15R 5%" RESC1005X40X25LL05T10 124.05,5 r270 top
R89 "15R 5%" RESC1005X40X25LL05T10 124.9,7.5 r270 top
R90 "15R 5%" RESC1005X40X25LL05T10 116.4,5 r270 top
R91 "15R 5%" RESC1005X40X25LL05T10 122.35,5 r270 top
R92 "15R 5%" RESC1005X40X25LL05T10 123.2,7.5 r270 top
R93 "15R 5%" RESC1005X40X25LL05T10 121.725,7.5 r270 top
R94 "15R 5%" RESC1005X40X25LL05T10 120.425,7.5 r270 top
R95 "15R 5%" RESC1005X40X25LL05T10 119.8,5 r270 top
R96 "15R 5%" RESC1005X40X25LL05T10 117.25,7.5 r270 top
R97 "RC0402FR-0739RL" RESC1005X40X25LL05T10 113.051,23.87 r90 top
R98 "RC0402FR-0739RL" RESC1005X40X25LL05T10 114.351,23.87 r90 top
R99 "RC0402FR-0739RL" RESC1005X40X25LL05T10 115.651,23.87 r90 top
R100 "RC0402FR-0739RL" RESC1005X40X25LL05T10 116.951,23.87 r90 top
R101 "RC0402FR-0739RL" RESC1005X40X25LL05T10 118.251,23.87 r90 top
R102 "RC0402FR-0747RL" RESC1005X40X25LL05T10 4.318,20.955 r90 top
R103 "RC0402FR-0739RL" RESC1005X40X25LL05T10 119.551,23.87 r90 top
R104 "RC0402FR-0739RL" RESC1005X40X25LL05T10 120.851,23.87 r90 top
R105 "RC0402FR-0739RL" RESC1005X40X25LL05T10 122.151,23.87 r90 top
R106 "RC0402FR-0775RL" RESC1005X40X25LL05T10 65.825,5.2 r0 top
R107 "RC0402FR-0739RL" RESC1005X40X25LL05T10 123.451,23.87 r90 top
R108 "RC0402FR-0739RL" RESC1005X40X25LL05T10 124.751,23.87 r90 top
R109 "RC0402FR-0739RL" RESC1005X40X25LL05T10 126.051,23.87 r90 top
R110 "RC0402FR-0739RL" RESC1005X40X25LL05T10 127.351,23.87 r90 top
R111 "RC0402FR-0739RL" RESC1005X40X25LL05T10 128.651,23.87 r90 top
R112 "RC0402FR-0739RL" RESC1005X40X25LL05T10 113.074,26.918 r90 top
R113 "RC0402FR-0739RL" RESC1005X40X25LL05T10 114.374,26.918 r90 top
R114 "RC0402FR-0739RL" RESC1005X40X25LL05T10 115.674,26.918 r90 top
R115 "RC0402FR-0739RL" RESC1005X40X25LL05T10 126.111,20.447 r90 top
R116 "RC0402FR-0739RL" RESC1005X40X25LL05T10 116.974,26.918 r90 top
R117 "RC0402FR-0739RL" RESC1005X40X25LL05T10 127.3,20.5 r90 top
R118 "RC0402FR-0739RL" RESC1005X40X25LL05T10 118.274,26.918 r90 top
R119 "RC0402FR-0739RL" RESC1005X40X25LL05T10 119.574,26.918 r90 top
R120 "RC0402FR-0739RL" RESC1005X40X25LL05T10 120.874,26.918 r90 top
R121 "RC0402FR-0739RL" RESC1005X40X25LL05T10 122.174,26.918 r90 top
R122 "RC0402FR-0739RL" RESC1005X40X25LL05T10 123.474,26.918 r90 top
R123 "RC0402FR-0739RL" RESC1005X40X25LL05T10 124.774,26.918 r90 top
R124 "RC0402FR-0739RL" RESC1005X40X25LL05T10 126.074,26.918 r90 top
R125 "RC0402FR-0739RL" RESC1005X40X25LL05T10 127.374,26.918 r90 top
R126 "RC0402FR-0739RL" RESC1005X40X25LL05T10 128.674,26.918 r90 top
U1 "MT40A2G8SA-062E IT:F" SA_MFG 9.3,15.3 r180 top
U2 "MT40A2G8SA-062E IT:F" SA_MFG 20.23,15.3 r180 top
U3 "MT40A2G8SA-062E IT:F" SA_MFG 31.16,15.3 r180 top
U4 "MT40A2G8SA-062E IT:F" SA_MFG 42.09,15.3 r180 top
U5 "MT40A2G8SA-062E IT:F" SA_MFG 87.91,15.3 r180 top
U6 "MT40A2G8SA-062E IT:F" SA_MFG 98.84,15.3 r180 top
U7 "MT40A2G8SA-062E IT:F" SA_MFG 109.77,15.3 r180 top
U8 "MT40A2G8SA-062E IT:F" SA_MFG 120.7,15.3 r180 top
U9 "34AA04T-I/MUY" UDFN8_2x3MC_MCH 66.675,24 r90 top

## Footprints (in the part's own frame and the unit in brackets; to place one, negate y for a bottom-side part, rotate by r counter-clockwise, add the part's x,y. Pads: shape width x height; smd on the part's side, far side on the other; paste and mask are expansions set on the pad)
DDR4_UDIMM_288_MO309 [mm]
  rect 0.6x1.85 smd paste-1.5: 1(3.35,1.675) 2(4.2,1.675) 3(5.05,1.675) 4(5.9,1.675) 5(6.75,1.675) 6(7.6,1.675) 7(8.45,1.675) 8(9.3,1.675) 9(10.15,1.675) 10(11,1.675) 11(11.85,1.675) 12(12.7,1.675) 13(13.55,1.675) 14(14.4,1.675) 15(15.25,1.675) 16(16.1,1.675) 17(16.95,1.675) 18(17.8,1.675) 19(18.65,1.675) 20(19.5,1.675) 21(20.35,1.675) 22(21.2,1.675) 23(22.05,1.675) 24(22.9,1.675) 25(23.75,1.675) 26(24.6,1.675) 27(25.45,1.675) 28(26.3,1.675) 29(27.15,1.675) 30(28,1.675) 31(28.85,1.675) 32(29.7,1.675) 33(30.55,1.675) 34(31.4,1.675) 35(32.25,1.675) 117(107.05,1.675) 118(107.9,1.675) 119(108.75,1.675) 120(109.6,1.675) 121(110.45,1.675) 122(111.3,1.675) 123(112.15,1.675) 124(113,1.675) 125(113.85,1.675) 126(114.7,1.675) 127(115.55,1.675) 128(116.4,1.675) 129(117.25,1.675) 130(118.1,1.675) 131(118.95,1.675) 132(119.8,1.675) 133(120.65,1.675) 134(121.5,1.675) 135(122.35,1.675) 136(123.2,1.675) 137(124.05,1.675) 138(124.9,1.675) 139(125.75,1.675) 140(126.6,1.675) 141(127.45,1.675) 142(128.3,1.675) 143(129.15,1.675) 144(130,1.675)
  rect 0.6x1.892 smd paste-1.5: 36(33.1,1.654) 116(106.2,1.654)
  rect 0.6x1.933 smd paste-1.5: 37(33.95,1.633) 115(105.35,1.633)
  rect 0.6x1.975 smd paste-1.5: 38(34.8,1.613) 114(104.5,1.613)
  rect 0.6x2.017 smd paste-1.5: 39(35.65,1.592) 113(103.65,1.592)
  rect 0.6x2.058 smd paste-1.5: 40(36.5,1.571) 112(102.8,1.571)
  rect 0.6x2.1 smd paste-1.5: 41(37.35,1.55) 111(101.95,1.55)
  rect 0.6x2.142 smd paste-1.5: 42(38.2,1.529) 110(101.1,1.529)
  rect 0.6x2.183 smd paste-1.5: 43(39.05,1.508) 109(100.25,1.508)
  rect 0.6x2.225 smd paste-1.5: 44(39.9,1.488) 108(99.4,1.488)
  rect 0.6x2.267 smd paste-1.5: 45(40.75,1.467) 107(98.55,1.467)
  rect 0.6x2.308 smd paste-1.5: 46(41.6,1.446) 106(97.7,1.446)
  rect 0.6x2.35 smd paste-1.5: 47(42.45,1.425) 48(43.3,1.425) 49(44.15,1.425) 50(45,1.425) 51(45.85,1.425) 52(46.7,1.425) 53(47.55,1.425) 54(48.4,1.425) 55(49.25,1.425) 56(50.1,1.425) 57(50.95,1.425) 58(51.8,1.425) 59(52.65,1.425) 60(53.5,1.425) 61(54.35,1.425) 62(55.2,1.425) 63(56.05,1.425) 64(56.9,1.425) 65(57.75,1.425) 66(58.6,1.425) 67(59.45,1.425) 68(60.3,1.425) 69(61.15,1.425) 70(62,1.425) 71(62.85,1.425) 72(63.7,1.425) 73(64.55,1.425) 74(65.4,1.425) 75(66.25,1.425) 76(67.1,1.425) 77(67.95,1.425) 78(73.9,1.425) 79(74.75,1.425) 80(75.6,1.425) 81(76.45,1.425) 82(77.3,1.425) 83(78.15,1.425) 84(79,1.425) 85(79.85,1.425) 86(80.7,1.425) 87(81.55,1.425) 88(82.4,1.425) 89(83.25,1.425) 90(84.1,1.425) 91(84.95,1.425) 92(85.8,1.425) 93(86.65,1.425) 94(87.5,1.425) 95(88.35,1.425) 96(89.2,1.425) 97(90.05,1.425) 98(90.9,1.425) 99(91.75,1.425) 100(92.6,1.425) 101(93.45,1.425) 102(94.3,1.425) 103(95.15,1.425) 104(96,1.425) 105(96.85,1.425)
  rect 0.6x1.85 smd far side paste-1.5: 145(3.35,1.675) 146(4.2,1.675) 147(5.05,1.675) 148(5.9,1.675) 149(6.75,1.675) 150(7.6,1.675) 151(8.45,1.675) 152(9.3,1.675) 153(10.15,1.675) 154(11,1.675) 155(11.85,1.675) 156(12.7,1.675) 157(13.55,1.675) 158(14.4,1.675) 159(15.25,1.675) 160(16.1,1.675) 161(16.95,1.675) 162(17.8,1.675) 163(18.65,1.675) 164(19.5,1.675) 165(20.35,1.675) 166(21.2,1.675) 167(22.05,1.675) 168(22.9,1.675) 169(23.75,1.675) 170(24.6,1.675) 171(25.45,1.675) 172(26.3,1.675) 173(27.15,1.675) 174(28,1.675) 175(28.85,1.675) 176(29.7,1.675) 177(30.55,1.675) 178(31.4,1.675) 179(32.25,1.675) 261(107.05,1.675) 262(107.9,1.675) 263(108.75,1.675) 264(109.6,1.675) 265(110.45,1.675) 266(111.3,1.675) 267(112.15,1.675) 268(113,1.675) 269(113.85,1.675) 270(114.7,1.675) 271(115.55,1.675) 272(116.4,1.675) 273(117.25,1.675) 274(118.1,1.675) 275(118.95,1.675) 276(119.8,1.675) 277(120.65,1.675) 278(121.5,1.675) 279(122.35,1.675) 280(123.2,1.675) 281(124.05,1.675) 282(124.9,1.675) 283(125.75,1.675) 284(126.6,1.675) 285(127.45,1.675) 286(128.3,1.675) 287(129.15,1.675) 288(130,1.675)
  rect 0.6x1.892 smd far side paste-1.5: 180(33.1,1.654) 260(106.2,1.654)
  rect 0.6x1.933 smd far side paste-1.5: 181(33.95,1.633) 259(105.35,1.633)
  rect 0.6x1.975 smd far side paste-1.5: 182(34.8,1.613) 258(104.5,1.613)
  rect 0.6x2.017 smd far side paste-1.5: 183(35.65,1.592) 257(103.65,1.592)
  rect 0.6x2.058 smd far side paste-1.5: 184(36.5,1.571) 256(102.8,1.571)
  rect 0.6x2.1 smd far side paste-1.5: 185(37.35,1.55) 255(101.95,1.55)
  rect 0.6x2.142 smd far side paste-1.5: 186(38.2,1.529) 254(101.1,1.529)
  rect 0.6x2.183 smd far side paste-1.5: 187(39.05,1.508) 253(100.25,1.508)
  rect 0.6x2.225 smd far side paste-1.5: 188(39.9,1.488) 252(99.4,1.488)
  rect 0.6x2.267 smd far side paste-1.5: 189(40.75,1.467) 251(98.55,1.467)
  rect 0.6x2.308 smd far side paste-1.5: 190(41.6,1.446) 250(97.7,1.446)
  rect 0.6x2.35 smd far side paste-1.5: 191(42.45,1.425) 192(43.3,1.425) 193(44.15,1.425) 194(45,1.425) 195(45.85,1.425) 196(46.7,1.425) 197(47.55,1.425) 198(48.4,1.425) 199(49.25,1.425) 200(50.1,1.425) 201(50.95,1.425) 202(51.8,1.425) 203(52.65,1.425) 204(53.5,1.425) 205(54.35,1.425) 206(55.2,1.425) 207(56.05,1.425) 208(56.9,1.425) 209(57.75,1.425) 210(58.6,1.425) 211(59.45,1.425) 212(60.3,1.425) 213(61.15,1.425) 214(62,1.425) 215(62.85,1.425) 216(63.7,1.425) 217(64.55,1.425) 218(65.4,1.425) 219(66.25,1.425) 220(67.1,1.425) 221(67.95,1.425) 222(73.9,1.425) 223(74.75,1.425) 224(75.6,1.425) 225(76.45,1.425) 226(77.3,1.425) 227(78.15,1.425) 228(79,1.425) 229(79.85,1.425) 230(80.7,1.425) 231(81.55,1.425) 232(82.4,1.425) 233(83.25,1.425) 234(84.1,1.425) 235(84.95,1.425) 236(85.8,1.425) 237(86.65,1.425) 238(87.5,1.425) 239(88.35,1.425) 240(89.2,1.425) 241(90.05,1.425) 242(90.9,1.425) 243(91.75,1.425) 244(92.6,1.425) 245(93.45,1.425) 246(94.3,1.425) 247(95.15,1.425) 248(96,1.425) 249(96.85,1.425)
FP-C1608-080-0_1-IPC_C [mm]
  rect 0.931x0.812 smd paste+0 mask+0: 1(-0.541,0) 2(0.541,0)
  silkscreen extent -1.01,-0.85 1.01,0.85, body extent -1.11,-0.55 1.11,0.55, height 0.25
FP-CL511-IPC_C [mm]
  rect 0.515x0.472 smd paste+0 mask+0: 1(-0.379,0) 2(0.379,0)
  body extent -0.74,-0.38 0.74,0.38, height 0.25
FP-GRM15-MFG [mm]
  rect 0.4x0.5 smd paste+0 mask+0: 1(-0.4,0) 2(0.4,0)
  body extent -0.7,-0.38 0.7,0.38, height 0.25
FP-GRM155-0_05-IPC_C [mm]
  rect 0.515x0.472 smd paste+0 mask+0: 1(-0.379,0) 2(0.379,0)
  silkscreen extent -0.64,-0.67 0.64,0.67, body extent -0.74,-0.38 0.74,0.38, height 0.25
RESC0402(1005)_L [mm] "Chip Resistor, Body 1.0x0.5mm, IPC High Density"
  rect 0.45x0.55 smd: 1(-0.45,0) 2(0.45,0)
  body extent -0.52,-0.27 0.53,0.28, height 0.4
RESC1005X40X25LL05T10 [mm] "Chip Resistor, 2-Leads, Body 1.00x0.50mm, IPC High Density"
  rect 0.5x0.45 smd: 1(-0.375,0) 2(0.375,0)
  body extent -0.53,-0.27 0.53,0.28, height 0.4
SA_MFG [mm] "Recommended Land Pattern"
  round 0.34 smd: A1(-3.2,4.8) A2(-2.4,4.8) A3(-1.6,4.8) A7(1.6,4.8) A8(2.4,4.8) A9(3.2,4.8) B1(-3.2,4) B2(-2.4,4) B3(-1.6,4) B7(1.6,4) B8(2.4,4) B9(3.2,4) C1(-3.2,3.2) C2(-2.4,3.2) C3(-1.6,3.2) C7(1.6,3.2) C8(2.4,3.2) C9(3.2,3.2) D1(-3.2,2.4) D2(-2.4,2.4) D3(-1.6,2.4) D7(1.6,2.4) D8(2.4,2.4) D9(3.2,2.4) E1(-3.2,1.6) E2(-2.4,1.6) E3(-1.6,1.6) E7(1.6,1.6) E8(2.4,1.6) E9(3.2,1.6) F1(-3.2,0.8) F2(-2.4,0.8) F3(-1.6,0.8) F7(1.6,0.8) F8(2.4,0.8) F9(3.2,0.8) G1(-3.2,0) G2(-2.4,0) G3(-1.6,0) G7(1.6,0) G8(2.4,0) G9(3.2,0) H1(-3.2,-0.8) H2(-2.4,-0.8) H3(-1.6,-0.8) H7(1.6,-0.8) H8(2.4,-0.8) H9(3.2,-0.8) J1(-3.2,-1.6) J2(-2.4,-1.6) J3(-1.6,-1.6) J7(1.6,-1.6) J8(2.4,-1.6) J9(3.2,-1.6) K1(-3.2,-2.4) K2(-2.4,-2.4) K3(-1.6,-2.4) K7(1.6,-2.4) K8(2.4,-2.4) K9(3.2,-2.4) L1(-3.2,-3.2) L2(-2.4,-3.2) L3(-1.6,-3.2) L7(1.6,-3.2) L8(2.4,-3.2) L9(3.2,-3.2) M1(-3.2,-4) M2(-2.4,-4) M3(-1.6,-4) M7(1.6,-4) M8(2.4,-4) M9(3.2,-4) N1(-3.2,-4.8) N2(-2.4,-4.8) N3(-1.6,-4.8) N7(1.6,-4.8) N8(2.4,-4.8) N9(3.2,-4.8)
  silkscreen extent -4.47,-5.55 3.8,5.55, body extent -4.3,-6.05 4.3,6.05, height 0.25
UDFN8_2x3MC_MCH [mil]
  rect 26x10 smd paste+0 mask+0: 1(-59.04,29.53) 2(-59.04,9.84) 3(-59.04,-9.84) 4(-59.04,-29.53) 5(59.04,-29.53) 6(59.04,-9.84) 7(59.04,9.84) 8(59.04,29.53)
  silkscreen extent -89,-45 39,45, body extent -60,-40 60,40, height 19

## Part data
C1 C2 C3 C5 C6 C7 C8 C9 C11 C12 C13 C14 C15 C17 C18 C19 C20 C21 C23 C24 C25 C26 C27 C29 C30 C31 C32 C33 C35 C36 C37 C38 C39 C41 C42 C43 C44 C45 C47 C48 C49 C53 C54 C57 C58 C59 C60 C61 C62 C63 C64 C65 C66 C67 C68 C69 C70: library part CMP-2100-03641-2, "CAP CER 0.1UF 16V X7R 0402", Capacitance=0.10μF, Manufacturer=Murata, Manufacturer Part Number=GRM155R71C104KA88D, Package=GRM15, Temperature="-55°C to +125°C", Temperature Characteristic=X7R, Temperature Range High=+125°C, Temperature Range Low=-55°C, Tolerance=10%, Voltage Rating=16Vdc, Category=Cap, ComponentLink2Description=Datasheet, ComponentLink2URL=https://search.murata.co.jp/Ceramy/image/img/A01X/G101/ENG/GRM155R71H471KA01-01A.pdf, Device Class L1="Passive Components", Device Class L2=Capacitors, Device Class L3="Ceramic Capacitors", Digikey Description="CAP CER 0.1UF 16V X7R 0402", Height=0.55mm, Ipc Land Pattern Name=CAPC10050X219, Lead Free=yes, Material=Ceramic, Mouser Description="0402 0.1 uF 16V ±10 % Tolerance X7R SMT Multilayer Ceramic Capacitor", Octopart=https://octopart.com/grm155r71c104ka88d-murata-196880, RoHS=TRUE, Standoff Height=0mm
C4 C10 C16 C22 C28 C34 C40 C46: library part CMP-13271-001936-1, "Cap Ceramic 1uF 10V X5R ±10% SMD 0402 +85°C Paper T/R", Case Code (Imperial)=0402, Case Code (Metric)=1005, Dielectric=X5R, Max Operating Temperature=85°C, Min Operating Temperature=-55°C, Package Quantity=1, Tolerance=10%, Voltage Rating=10V, Capacitance=1uF, Case/Package=0402, Contact Plating=Tin, Depth=0.5mm, Height=0.5mm, Length=1mm, Material=Ceramic, Mount="Surface Mount", Packaging="Tape and Reel", Radiation Hardening=No, Thickness=0.022inch, Width=0.02inch
C50 C51 C52 C55: library part CMP-2000-04981-2, "Multilayer Ceramic Capacitors 4.7μF ±10% 16V X5R SMD 0603", Case Code (Imperial)=0603, Case Code (Metric)=1608, Dielectric=X5R, Dielectric Material=Ceramic, Max Operating Temperature=85°C, Min Operating Temperature=-55°C, Package Quantity=1, Tolerance=10%, Voltage=16V, Capacitance=4.7uF, Case/Package=0603, Construction=Flat, Depth=0.8mm, Height=0.8mm, Lead Free="Lead Free", Length=1.6mm, Mount="Surface Mount", Packaging="Tape and Reel", REACH SVHC="No SVHC", RoHS Compliant=Yes, Series=C, Termination=SMD/SMT, Thickness=0.035inch, Voltage Rating=16V, Voltage Rating (DC)=16V, Weight=7.1E-05oz, Width=0.031inch
C56: library part CMP-2008-04637-5, "Chip Multilayer Ceramic Capacitors for General Purpose, 0402, 10000pF, X7R, 15%, 10%, 50V", Capacitance=10nF, Case Code (Imperial)=0402, Case Code (Metric)=1005, Dielectric=X7R, Max Operating Temperature=125°C, Min Operating Temperature=-55°C, Package Quantity=1, Tolerance=10%, Voltage=25V, Voltage Rating=50V, Case/Package=0402, Depth=0.5mm, Height=0.5mm, Lead Free="Lead Free", Length=1mm, Material=Ceramic, Mount="Surface Mount", Number of Pins=2, Packaging="Tape and Reel", Radiation Hardening=No, REACH SVHC="No SVHC", Termination=SMD/SMT, Thickness=0.022inch, Voltage Rating (DC)=50V, Width=0.02inch
J1: library part Component_1, "DDR4 288-pin UDIMM edge fingers, 0.85 mm pitch (JEDEC MO-309)"
R1 R13 R25 R37 R49 R61 R73 R85: library part CMP-1011-00438-1, "240R 0.063W 1% 0402 (1005 Metric)  SMD", Case-EIA=0402, Case-Metric=1005, Power="0.063 W", Tolerance="1 %", Technology=SMT
R2 R3 R4 R5 R6 R7 R8 R9 R10 R11 R12 R14 R15 R16 R17 R18 R19 R20 R21 R22 R23 R24 R26 R27 R28 R29 R30 R31 R32 R33 R34 R35 R36 R38 R39 R40 R41 R42 R43 R44 R45 R46 R47 R48 R50 R51 R52 R53 R54 R55 R56 R57 R58 R59 R60 R62 R63 R64 R65 R66 R67 R68 R69 R70 R71 R72 R74 R75 R76 R77 R78 R79 R80 R81 R82 R83 R84 R86 R87 R88 R89 R90 R91 R92 R93 R94 R95 R96: library part CMP-2002-07413-1, Manufacturer="Yageo / Phycomp", Part Number=RC0402FR-0715RL
R97 R98 R99 R100 R101 R103 R104 R105 R107 R108 R109 R110 R111 R112 R113 R114 R115 R116 R117 R118 R119 R120 R121 R122 R123 R124 R125 R126: library part CMP-1011-00350-2, Manufacturer="Yageo / Phycomp", Part Number=RC0402FR-0739RL
R102: library part CMP-2002-07703-1, Manufacturer="Yageo / Phycomp", Part Number=RC0402FR-0747RL
R106: library part CMP-2002-07798-1, Manufacturer="Yageo / Phycomp", Part Number=RC0402FR-0775RL
U1 U2 U3 U4 U5 U6 U7 U8: library part CMP-00526-125391410-1, "DRAMChip DDR4 SDRAM 16Gbit 2Gx8 1.2V 78-Pin FBGA Tray", ComponentLink1Description="Manufacturer's Website", ComponentLink1URL=http://www.micron.com/, ComponentLink2Description="Datasheet URL", ComponentLink2URL=https://4donline.ihs.com/images/VipMasterIC/IC/MICT/MICT-S-A0014105731/MICT-S-A0014105731-1.pdf?hkey=6D3A4C79FDBF58556ACFDE234799DDF0, ComponentLink3Description="Manufacturer's Package Drawing", ComponentLink3URL=https://www.micron.com/content/dam/micron/global/public/products/customer-service-note/csn33-bga-user-guide.pdf, HelpURL=https://4donline.ihs.com/images/VipMasterIC/IC/MICT/MICT-S-A0014105731/MICT-S-A0014105731-1.pdf?hkey=6D3A4C79FDBF58556ACFDE234799DDF0
U9: library part 34AA04T-IMUY, "No Description Available", Manufacturer_Name=Microchip, Copyright="Copyright (C) 2026 Ultra Librarian. All rights reserved.", Manufacturer_Part_Number=34AA04T-I/MUY, RefDes=RefDes, Type=Type

## Via types
v1: diameter 0.4, hole 0.2, Top Layer 1 to Bottom Layer 1, tented both sides, 409 vias
v2: diameter 0.45, hole 0.25, Top Layer 1 to Bottom Layer 1, tented both sides, 72 vias

## Nets (pads, with @x,y where several pads share a name; then routed paths per layer and width w, separated by ;. In a path a pad name is that pad's centre, name@x,y a point inside that pad or via, vN(x,y) a via of type N, cw(c..) or ccw(c..) an arc to the next point about the centre after c; other vN are vias at no path point)
A0: J1.79 R97.1 U1.L3 U2.L3 U3.L3 U4.L3 U5.L3 U6.L3 U7.L3 U8.L3 | length 4.5
  Top Layer 1 w0.075: U1.L3@10.9,18.5 v1(11.3,18.9) ; U2.L3@21.83,18.5 v1(22.23,18.9) ; U3.L3@32.76,18.5 v1(33.16,18.9) ; U4.L3@43.69,18.5 v1(44.09,18.9) ; U5.L3@89.51,18.5 v1(89.91,18.9) ; U6.L3@100.44,18.5 v1(100.84,18.9) ; U7.L3@111.37,18.5 v1(111.77,18.9) ; U8.L3@122.3,18.5 v1(122.7,18.9)
A1: J1.72 R100.1 U1.L7 U2.L7 U3.L7 U4.L7 U5.L7 U6.L7 U7.L7 U8.L7 | length 4.5
  Top Layer 1 w0.075: v1(7.3,18.9) U1.L7@7.7,18.5 ; v1(18.23,18.9) U2.L7@18.63,18.5 ; v1(29.16,18.9) U3.L7@29.56,18.5 ; v1(40.09,18.9) U4.L7@40.49,18.5 ; v1(85.91,18.9) U5.L7@86.31,18.5 ; v1(96.84,18.9) U6.L7@97.24,18.5 ; v1(107.77,18.9) U7.L7@108.17,18.5 ; v1(118.7,18.9) U8.L7@119.1,18.5
A2: J1.216 R103.1 U1.M3 U2.M3 U3.M3 U4.M3 U5.M3 U6.M3 U7.M3 U8.M3 | length 4.5
  Top Layer 1 w0.075: U1.M3@10.9,19.3 v1(11.3,19.7) ; U2.M3@21.83,19.3 v1(22.23,19.7) ; U3.M3@32.76,19.3 v1(33.16,19.7) ; U4.M3@43.69,19.3 v1(44.09,19.7) ; U5.M3@89.51,19.3 v1(89.91,19.7) ; U6.M3@100.44,19.3 v1(100.84,19.7) ; U7.M3@111.37,19.3 v1(111.77,19.7) ; U8.M3@122.3,19.3 v1(122.7,19.7)
A3: J1.71 R105.1 U1.K7 U2.K7 U3.K7 U4.K7 U5.K7 U6.K7 U7.K7 U8.K7 | length 4.5
  Top Layer 1 w0.075: v1(7.3,18.1) U1.K7@7.7,17.7 ; v1(18.23,18.1) U2.K7@18.63,17.7 ; v1(29.16,18.1) U3.K7@29.56,17.7 ; v1(40.09,18.1) U4.K7@40.49,17.7 ; v1(85.91,18.1) U5.K7@86.31,17.7 ; v1(96.84,18.1) U6.K7@97.24,17.7 ; v1(107.77,18.1) U7.K7@108.17,17.7 ; v1(118.7,18.1) U8.K7@119.1,17.7
A4: J1.214 R108.1 U1.K3 U2.K3 U3.K3 U4.K3 U5.K3 U6.K3 U7.K3 U8.K3 | length 4.5
  Top Layer 1 w0.075: U1.K3@10.9,17.7 v1(11.3,18.1) ; U2.K3@21.83,17.7 v1(22.23,18.1) ; U3.K3@32.76,17.7 v1(33.16,18.1) ; U4.K3@43.69,17.7 v1(44.09,18.1) ; U5.K3@89.51,17.7 v1(89.91,18.1) ; U6.K3@100.44,17.7 v1(100.84,18.1) ; U7.K3@111.37,17.7 v1(111.77,18.1) ; U8.K3@122.3,17.7 v1(122.7,18.1)
A5: J1.213 R110.1 U1.L8 U2.L8 U3.L8 U4.L8 U5.L8 U6.L8 U7.L8 U8.L8 | length 4.5
  Top Layer 1 w0.075: v1(6.5,18.9) U1.L8@6.9,18.5 ; v1(17.43,18.9) U2.L8@17.83,18.5 ; v1(28.36,18.9) U3.L8@28.76,18.5 ; v1(39.29,18.9) U4.L8@39.69,18.5 ; v1(85.11,18.9) U5.L8@85.51,18.5 ; v1(96.04,18.9) U6.L8@96.44,18.5 ; v1(106.97,18.9) U7.L8@107.37,18.5 ; v1(117.9,18.9) U8.L8@118.3,18.5
A6: J1.69 R112.1 U1.L2 U2.L2 U3.L2 U4.L2 U5.L2 U6.L2 U7.L2 U8.L2 | length 4.5
  Top Layer 1 w0.075: U1.L2@11.7,18.5 v1(12.1,18.9) ; U2.L2@22.63,18.5 v1(23.03,18.9) ; U3.L2@33.56,18.5 v1(33.96,18.9) ; U4.L2@44.49,18.5 v1(44.89,18.9) ; U5.L2@90.31,18.5 v1(90.71,18.9) ; U6.L2@101.24,18.5 v1(101.64,18.9) ; U7.L2@112.17,18.5 v1(112.57,18.9) ; U8.L2@123.1,18.5 v1(123.5,18.9)
A7: J1.211 R114.1 U1.M8 U2.M8 U3.M8 U4.M8 U5.M8 U6.M8 U7.M8 U8.M8 | length 4.5
  Top Layer 1 w0.075: v1(6.5,19.7) U1.M8@6.9,19.3 ; v1(17.43,19.7) U2.M8@17.83,19.3 ; v1(28.36,19.7) U3.M8@28.76,19.3 ; v1(39.29,19.7) U4.M8@39.69,19.3 ; v1(85.11,19.7) U5.M8@85.51,19.3 ; v1(96.04,19.7) U6.M8@96.44,19.3 ; v1(106.97,19.7) U7.M8@107.37,19.3 ; v1(117.9,19.7) U8.M8@118.3,19.3